# EAGLE board homegreen_node_basic v1.4.4_panel (EAGLE 9.6.2), part 1 of 2
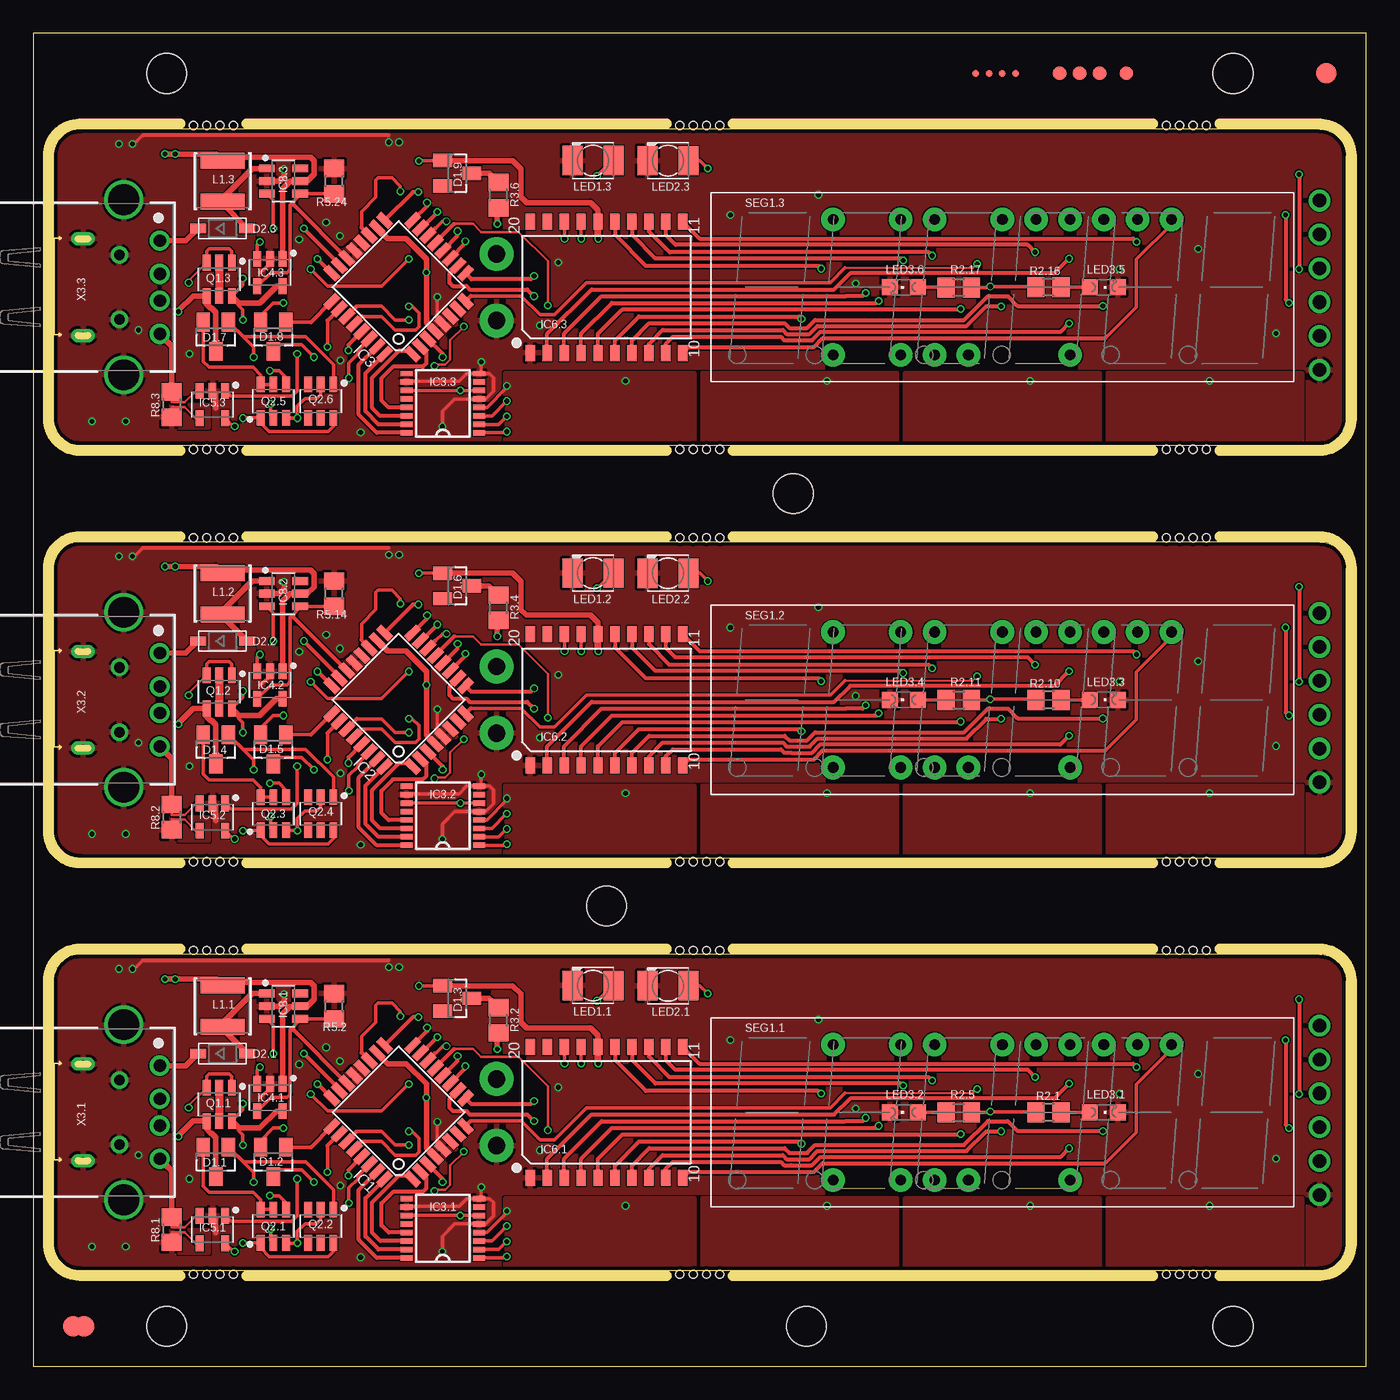
[diagram p0: board, top side]
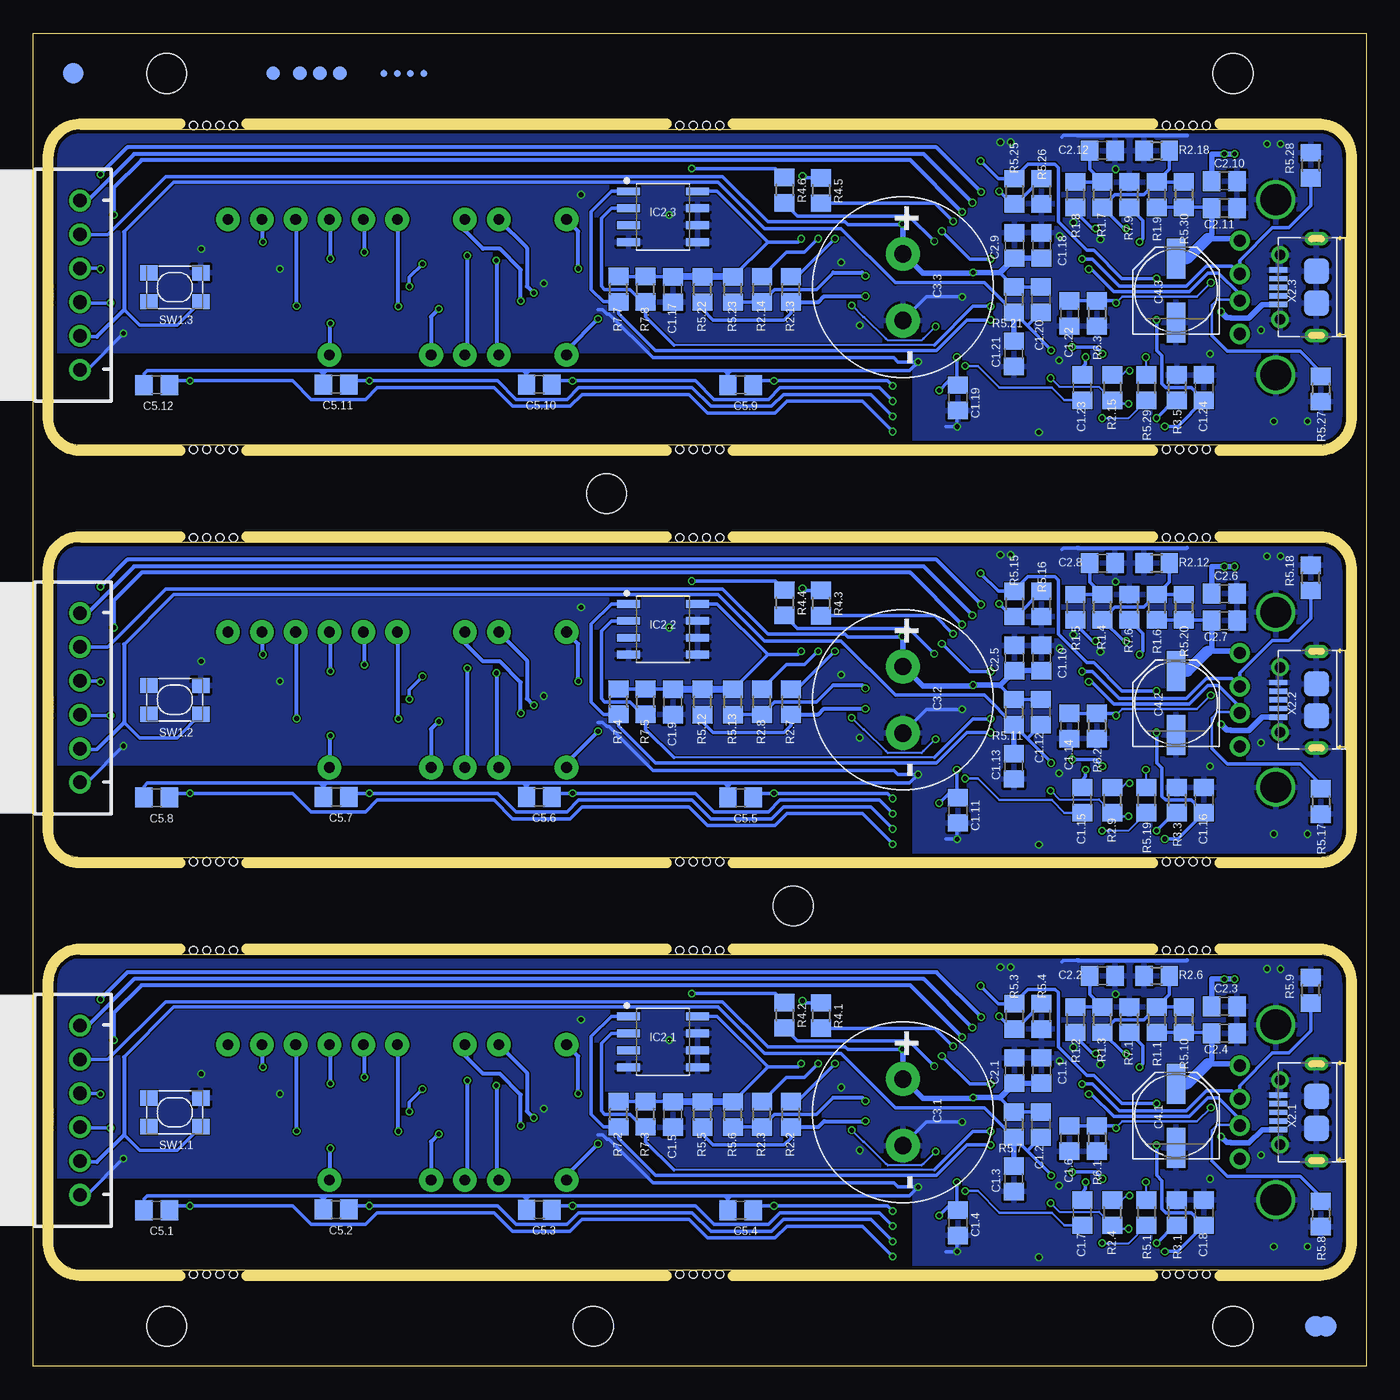
[diagram p1: board, bottom side, seen from below]

Size 100 x 100 mm. Coordinates in mm from the lower left corner, seen from the top.
Outline: 0,0 100,0 100,100 0,100 0,0
Outline: 3.5,7.2 96.5,7.2 arc90 98.5,9.2 98.5,28.9 arc90 96.5,30.9 3.5,30.9 arc90 1.5,28.9 1.5,9.2 arc90 3.5,7.2
Outline: 3.5,38.15 96.5,38.15 arc90 98.5,40.15 98.5,59.85 arc90 96.5,61.85 3.5,61.85 arc90 1.5,59.85 1.5,40.15 arc90 3.5,38.15
Outline: 3.5,69.1 96.5,69.1 arc90 98.5,71.1 98.5,90.8 arc90 96.5,92.8 3.5,92.8 arc90 1.5,90.8 1.5,71.1 arc90 3.5,69.1
Copper layers (1*16): Top 0.035mm / dielectric 1.5mm / Bottom 0.035mm
Design rules "seeed_advanced_2layer": minimum track width 4mil, minimum drill 0.2mm, track to track 4mil, track to pad 4mil, pad to pad 4mil, via to via 12mil, smd to smd 4mil, copper to edge 0.3mm, drill to drill 0.2mm, minimum pad ring 0.1mm, minimum via ring 0.1mm, stop-mask expansion 0.1mm, vias tented up to drill 0mil, thermal gap 0.2mm
Holes 0.6 mm at 13,62.15 14,62.15 49.5,62.15 50.5,62.15 86,62.15 87,62.15 86,37.85 87,37.85 49.5,37.85 50.5,37.85 13,37.85 14,37.85 13,93.1 14,93.1 49.5,93.1 50.5,93.1 86,93.1 87,93.1 86,68.8 87,68.8 49.5,68.8 50.5,68.8 13,68.8 14,68.8 13,31.2 14,31.2 49.5,31.2 50.5,31.2 86,31.2 87,31.2 86,6.9 87,6.9 49.5,6.9 50.5,6.9 13,6.9 14,6.9 12,93.1 15,93.1 48.5,93.1 51.5,93.1 85,93.1 88,93.1 12,68.8 15,68.8 48.5,68.8 51.5,68.8 85,68.8 88,68.8 12,62.15 15,62.15 48.5,62.15 51.5,62.15 85,62.15 88,62.15 85,37.85 88,37.85 48.5,37.85 51.5,37.85 12,37.85 15,37.85 12,31.2 15,31.2 48.5,31.2 51.5,31.2 85,31.2 88,31.2 85,6.9 88,6.9 48.5,6.9 51.5,6.9 12,6.9 15,6.9
Holes 3 mm at 57,65.47 43,34.52 58,3 10,3 90,3 10,97 90,97
Milling: 42 lines

## Footprints (pad centres in the part's own frame; a part is rotated, then mirrored left to right if it is on the bottom)
C0805 = smd 1.3 x 1.5: 1 -0.95,0; 2 0.95,0
C_FYD0H104ZF = drill 1.3 pad 2.54: + -2.5,0; - 2.5,0
PANASONIC_D = smd 3 x 1.4: + 2.4,0; - -2.4,0
SOT23 = smd 1 x 1.4: 1 -0.95,-1.1; 2 0.95,-1.1; 3 0,1.1
SOD-123 = smd 1.2 x 0.7: A 1.85,0; C -1.85,0
FID_060_P = smd 1.524 x 1.524 bottom: FIDB 0,0 | smd 1.524 x 1.524: FIDT 0,0
FID_040_P = smd 1.016 x 1.016 bottom: FIDB 0,0 | smd 1.016 x 1.016: FIDT 0,0
FID_020_P = smd 0.508 x 0.508 bottom: FIDB 0,0 | smd 0.508 x 0.508: FIDT 0,0
TQFP32-08 = smd 1.27 x 0.559: 1 -4.293,2.8; 2 -4.293,2; 3 -4.293,1.2; 4 -4.293,0.4; 5 -4.293,-0.4; 6 -4.293,-1.2; 7 -4.293,-2; 8 -4.293,-2.8; 17 4.293,-2.8; 18 4.293,-2; 19 4.293,-1.2; 20 4.293,-0.4; 21 4.293,0.4; 22 4.293,1.2; 23 4.293,2; 24 4.293,2.8 | smd 0.559 x 1.27: 9 -2.8,-4.293; 10 -2,-4.293; 11 -1.2,-4.293; 12 -0.4,-4.293; 13 0.4,-4.293; 14 1.2,-4.293; 15 2,-4.293; 16 2.8,-4.293; 25 2.8,4.293; 26 2,4.293; 27 1.2,4.293; 28 0.4,4.293; 29 -0.4,4.293; 30 -1.2,4.293; 31 -2,4.293; 32 -2.8,4.293
SO8 = smd 1.746 x 0.592: 1 -2.585,1.905; 2 -2.585,0.635; 3 -2.585,-0.635; 4 -2.585,-1.905; 5 2.585,-1.905; 6 2.585,-0.635; 7 2.585,0.635; 8 2.585,1.905
SSOP16 = smd 0.914 x 0.406: 1 -2.718,2.223; 2 -2.718,1.587; 3 -2.718,0.953; 4 -2.718,0.318; 5 -2.718,-0.318; 6 -2.718,-0.953; 7 -2.718,-1.587; 8 -2.718,-2.223; 9 2.718,-2.223; 10 2.718,-1.587; 11 2.718,-0.953; 12 2.718,-0.318; 13 2.718,0.318; 14 2.718,0.953; 15 2.718,1.587; 16 2.718,2.223
SOT23-5 = smd 1.18 x 0.589: 1 -1.024,0.95; 2 -1.024,0; 3 -1.024,-0.95; 4 1.024,-0.95; 5 1.024,0.95
SOP20-1.27-12.7X7.65MM = smd 0.7 x 1.2: 1 -5.715,-4.925; 2 -4.445,-4.925; 3 -3.175,-4.925; 4 -1.905,-4.925; 5 -0.635,-4.925; 6 0.635,-4.925; 7 1.905,-4.925; 8 3.175,-4.925; 9 4.445,-4.925; 10 5.715,-4.925; 11 5.715,4.925; 12 4.445,4.925; 13 3.175,4.925; 14 1.905,4.925; 15 0.635,4.925; 16 -0.635,4.925; 17 -1.905,4.925; 18 -3.175,4.925; 19 -4.445,4.925; 20 -5.715,4.925
SOT23-6 = smd 1.171 x 0.589: 1 -1.25,0.95; 2 -1.25,0; 3 -1.25,-0.95; 4 1.25,-0.95; 5 1.25,0; 6 1.25,0.95
WE-LQSH_4020 = smd 1.2 x 3.3: 1 -1.55,0; 2 1.55,0
KA-3528ASYC = smd 1.5 x 2.2: A -1.55,0; C 1.55,0
CHIPLED_0805 = smd 1.2 x 1.2: A 0,-1.05; C 0,1.05
R0805 = smd 1.3 x 1.5: 1 -0.95,0; 2 0.95,0
7SEG_6D_FJ3661BH = drill 0.8 pad 1.778: P1 -12.7,-5.08; P3 -7.62,-5.08; P4 -5.08,-5.08; P5 -2.54,-5.08; P8 5.08,-5.08; P12 12.7,5.08; P13 10.16,5.08; P14 7.62,5.08; P15 5.08,5.08; P16 2.54,5.08; P17 0,5.08; P19 -5.08,5.08; P20 -7.62,5.08; P22 -12.7,5.08
SW4-SMD-4.2X3.2X2.5MM = smd 1.3 x 1.15: 1 -1.95,1.075; 2 1.95,1.075; 3 -1.95,-1.075; 4 1.95,-1.075
JST-XH-06-PACKAGE-ROUND-PAD-ANGLED = drill 1.016: 1 -6.35,0; 2 -3.81,0; 3 -1.27,0; 4 1.27,0; 5 3.81,0; 6 6.35,0
ZX62-B-5PA = smd 0.4 x 1.35: 1 -1.3,2.875; 2 -0.65,2.875; 3 0,2.875; 4 0.65,2.875; 5 1.3,2.875 | smd 1.9 x 1.9: P1 -1.2,0; P2 1.2,0 | drill 0.508 pad 1.016 long: P3 -3.625,0; P4 3.625,0 | drill 0.8: P5 -2.425,2.73; P6 2.425,2.73
61400416021 = drill 0.92: 1 -3.5,5.99; 2 -1,5.99; 3 1,5.99; 4 3.5,5.99 | drill 2.3: S1 -6.57,3.28; S2 6.57,3.28

## Placement (x,y rotation side)
C1.1  100n  [C0805]  24.36,22.19 270 bottom
C1.2  100n  [C0805]  24.41,18.12 90 bottom
C1.3  100n  [C0805]  26.44,14.06 90 bottom
C1.4  100n  [C0805]  30.63,10.76 270 bottom
C1.5  100n  [C0805]  52.01,18.88 90 bottom
C1.6  100n  [C0805]  22.25,17.08 90 bottom
C1.7  100n  [C0805]  21.31,11.52 90 bottom
C1.8  100n  [C0805]  12.17,11.52 90 bottom
C1.9  100n  [C0805]  52.01,49.83 90 bottom
C1.10  100n  [C0805]  24.36,53.14 270 bottom
C1.11  100n  [C0805]  30.63,41.71 270 bottom
C1.12  100n  [C0805]  24.41,49.07 90 bottom
C1.13  100n  [C0805]  26.44,45.01 90 bottom
C1.14  100n  [C0805]  22.25,48.03 90 bottom
C1.15  100n  [C0805]  21.31,42.47 90 bottom
C1.16  100n  [C0805]  12.17,42.47 90 bottom
C1.17  100n  [C0805]  52.01,80.78 90 bottom
C1.18  100n  [C0805]  24.36,84.09 270 bottom
C1.19  100n  [C0805]  30.63,72.66 270 bottom
C1.20  100n  [C0805]  24.41,80.02 90 bottom
C1.21  100n  [C0805]  26.44,75.96 90 bottom
C1.22  100n  [C0805]  22.25,78.98 90 bottom
C1.23  100n  [C0805]  21.31,73.42 90 bottom
C1.24  100n  [C0805]  12.17,73.42 90 bottom
C2.1  10u  [C0805]  26.39,22.19 270 bottom
C2.2  10u  [C0805]  19.79,29.3 0 bottom
C2.3  10u  [C0805]  10.64,27.01 0 bottom
C2.4  10u  [C0805]  10.64,24.98 0 bottom
C2.5  10u  [C0805]  26.39,53.14 270 bottom
C2.6  10u  [C0805]  10.64,57.96 0 bottom
C2.7  10u  [C0805]  10.64,55.93 0 bottom
C2.8  10u  [C0805]  19.79,60.25 0 bottom
C2.9  10u  [C0805]  26.39,84.09 270 bottom
C2.10  10u  [C0805]  10.64,88.91 0 bottom
C2.11  10u  [C0805]  10.64,86.88 0 bottom
C2.12  10u  [C0805]  19.79,91.2 0 bottom
C3.1  0.33F  [C_FYD0H104ZF]  34.75,19.05 270 bottom
C3.2  0.33F  [C_FYD0H104ZF]  34.75,50 270 bottom
C3.3  0.33F  [C_FYD0H104ZF]  34.75,80.95 270 bottom
C4.1  330u  [PANASONIC_D]  14.26,18.8 90 bottom
C4.2  330u  [PANASONIC_D]  14.26,49.75 90 bottom
C4.3  330u  [PANASONIC_D]  14.26,80.7 90 bottom
C5.1  5p  [C0805]  90.74,11.71 180 bottom
C5.2  5p  [C0805]  77.28,11.76 180 bottom
C5.3  5p  [C0805]  62.04,11.75 180 bottom
C5.4  5p  [C0805]  46.93,11.71 180 bottom
C5.5  5p  [C0805]  46.93,42.66 180 bottom
C5.6  5p  [C0805]  62.04,42.7 180 bottom
C5.7  5p  [C0805]  77.28,42.71 180 bottom
C5.8  5p  [C0805]  90.74,42.66 180 bottom
C5.9  5p  [C0805]  46.93,73.61 180 bottom
C5.10  5p  [C0805]  62.04,73.65 180 bottom
C5.11  5p  [C0805]  77.28,73.66 180 bottom
C5.12  5p  [C0805]  90.74,73.61 180 bottom
D1.1  BAT54S  [SOT23]  13.69,15.33 180 top
D1.2  BAT54S  [SOT23]  18.01,15.33 180 top
D1.3  BAT54S  [SOT23]  31.8,27.6 270 top
D1.4  BAT54S  [SOT23]  13.69,46.28 180 top
D1.5  BAT54S  [SOT23]  18.01,46.28 180 top
D1.6  BAT54S  [SOT23]  31.8,58.55 270 top
D1.7  BAT54S  [SOT23]  13.69,77.23 180 top
D1.8  BAT54S  [SOT23]  18.01,77.23 180 top
D1.9  BAT54S  [SOT23]  31.8,89.5 270 top
D2.1  DSS24  [SOD-123]  14.2,23.46 0 top
D2.2  DSS24  [SOD-123]  14.2,54.41 0 top
D2.3  DSS24  [SOD-123]  14.2,85.36 0 top
E$1  [FID_060_P]  3,3 0 top
E$2  [FID_060_P]  3.8,3 0 top
E$3  [FID_060_P]  97,97 0 top
E$4  [FID_040_P]  82,97 0 top
E$5  [FID_040_P]  80,97 0 top
E$6  [FID_040_P]  78.5,97 0 top
E$7  [FID_040_P]  77,97 0 top
E$8  [FID_020_P]  73.7,97 0 top
E$9  [FID_020_P]  72.7,97 0 top
E$10  [FID_020_P]  71.7,97 0 top
E$11  [FID_020_P]  70.7,97 0 top
IC1  [TQFP32-08]  27.41,19.05 135 top
IC2  [TQFP32-08]  27.41,50 135 top
IC2.1  LM75B  [SO8]  52.76,24.34 0 bottom
IC2.2  LM75B  [SO8]  52.76,55.29 0 bottom
IC2.3  LM75B  [SO8]  52.76,86.24 0 bottom
IC3  [TQFP32-08]  27.41,80.95 135 top
IC3.1  TTP224NS  [SSOP16]  30.73,10.35 180 top
IC3.2  TTP224NS  [SSOP16]  30.73,41.3 180 top
IC3.3  TTP224NS  [SSOP16]  30.73,72.25 180 top
IC4.1  MT9700MT9700  [SOT23-5]  17.76,20.15 270 top
IC4.2  MT9700MT9700  [SOT23-5]  17.76,51.1 270 top
IC4.3  MT9700MT9700  [SOT23-5]  17.76,82.05 270 top
IC5.1  INA180  [SOT23-5]  13.44,10.25 270 top
IC5.2  INA180  [SOT23-5]  13.44,41.2 270 top
IC5.3  INA180  [SOT23-5]  13.44,72.15 270 top
IC6.1  TM1637-sop20  [SOP20-1.27-12.7X7.65MM]  43,19.05 0 top
IC6.2  TM1637-sop20  [SOP20-1.27-12.7X7.65MM]  43,50 0 top
IC6.3  TM1637-sop20  [SOP20-1.27-12.7X7.65MM]  43,80.95 0 top
IC8.1  MT3608  [SOT23-6]  18.77,27.01 0 top
IC8.2  MT3608  [SOT23-6]  18.77,57.96 0 top
IC8.3  MT3608  [SOT23-6]  18.77,88.91 0 top
L1.1  TYA40202R2M-10  [WE-LQSH_4020]  14.2,27.01 270 top
L1.2  TYA40202R2M-10  [WE-LQSH_4020]  14.2,57.96 270 top
L1.3  TYA40202R2M-10  [WE-LQSH_4020]  14.2,88.91 270 top
LED1.1  green  [KA-3528ASYC]  41.99,28.55 180 top
LED1.2  green  [KA-3528ASYC]  41.99,59.5 180 top
LED1.3  green  [KA-3528ASYC]  41.99,90.45 180 top
LED2.1  red  [KA-3528ASYC]  47.62,28.54 180 top
LED2.2  red  [KA-3528ASYC]  47.62,59.49 180 top
LED2.3  red  [KA-3528ASYC]  47.62,90.44 180 top
LED3.1  white  [CHIPLED_0805]  80.3,19.05 270 top
LED3.2  white  [CHIPLED_0805]  65.3,19.05 90 top
LED3.3  white  [CHIPLED_0805]  80.3,50 270 top
LED3.4  white  [CHIPLED_0805]  65.3,50 90 top
LED3.5  white  [CHIPLED_0805]  80.3,80.95 270 top
LED3.6  white  [CHIPLED_0805]  65.3,80.95 90 top
Q1.1  WST2011  [SOT23-6]  13.95,19.65 270 top
Q1.2  WST2011  [SOT23-6]  13.95,50.6 270 top
Q1.3  WST2011  [SOT23-6]  13.95,81.55 270 top
Q2.1  BC817DPN  [SOT23-6]  18.01,10.5 90 top
Q2.2  BC817DPN  [SOT23-6]  21.57,10.5 270 top
Q2.3  BC817DPN  [SOT23-6]  18.01,41.45 90 top
Q2.4  BC817DPN  [SOT23-6]  21.57,41.45 270 top
Q2.5  BC817DPN  [SOT23-6]  18.01,72.4 90 top
Q2.6  BC817DPN  [SOT23-6]  21.57,72.4 270 top
R1.1  10k  [R0805]  15.72,26 270 bottom
R1.2  10k  [R0805]  21.82,26 270 bottom
R1.3  10k  [R0805]  19.79,26 90 bottom
R1.4  10k  [R0805]  19.79,56.95 90 bottom
R1.5  10k  [R0805]  21.82,56.95 270 bottom
R1.6  10k  [R0805]  15.72,56.95 270 bottom
R1.7  10k  [R0805]  19.79,87.9 90 bottom
R1.8  10k  [R0805]  21.82,87.9 270 bottom
R1.9  10k  [R0805]  15.72,87.9 270 bottom
R2.1  1k  [R0805]  76.17,19.04 180 top
R2.2  1k  [R0805]  43.16,18.9 90 bottom
R2.3  1k  [R0805]  45.34,18.9 90 bottom
R2.4  1k  [R0805]  19.03,11.52 90 bottom
R2.5  1k  [R0805]  69.43,19.04 0 top
R2.6  1k  [R0805]  15.72,29.3 0 bottom
R2.7  1k  [R0805]  43.16,49.85 90 bottom
R2.8  1k  [R0805]  45.34,49.85 90 bottom
R2.9  1k  [R0805]  19.03,42.47 90 bottom
R2.10  1k  [R0805]  76.17,49.99 180 top
R2.11  1k  [R0805]  69.43,49.99 0 top
R2.12  1k  [R0805]  15.72,60.25 0 bottom
R2.13  1k  [R0805]  43.16,80.8 90 bottom
R2.14  1k  [R0805]  45.34,80.8 90 bottom
R2.15  1k  [R0805]  19.03,73.42 90 bottom
R2.16  1k  [R0805]  76.17,80.94 180 top
R2.17  1k  [R0805]  69.43,80.94 0 top
R2.18  1k  [R0805]  15.72,91.2 0 bottom
R3.1  47  [R0805]  14.2,11.52 270 bottom
R3.2  47  [R0805]  34.9,25.96 90 top
R3.3  47  [R0805]  14.2,42.47 270 bottom
R3.4  47  [R0805]  34.9,56.91 90 top
R3.5  47  [R0805]  14.2,73.42 270 bottom
R3.6  47  [R0805]  34.9,87.86 90 top
R4.1  3k  [R0805]  40.9,26.3 270 bottom
R4.2  3k  [R0805]  43.64,26.34 270 bottom
R4.3  3k  [R0805]  40.9,57.25 270 bottom
R4.4  3k  [R0805]  43.64,57.29 270 bottom
R4.5  3k  [R0805]  40.9,88.2 270 bottom
R4.6  3k  [R0805]  43.64,88.24 270 bottom
R5.1  100k  [R0805]  16.49,11.52 270 bottom
R5.2  100k  [R0805]  22.58,27.01 90 top
R5.3  100k  [R0805]  26.39,26.25 270 bottom
R5.4  100k  [R0805]  24.36,26.25 270 bottom
R5.5  100k  [R0805]  49.79,18.88 90 bottom
R5.6  100k  [R0805]  47.51,18.88 90 bottom
R5.7  100k  [R0805]  26.44,18.12 270 bottom
R5.8  100k  [R0805]  3.4,11.42 270 bottom
R5.9  100k  [R0805]  4.15,28.2 90 bottom
R5.10  100k  [R0805]  13.69,26 270 bottom
R5.11  100k  [R0805]  26.44,49.07 270 bottom
R5.12  100k  [R0805]  49.79,49.83 90 bottom
R5.13  100k  [R0805]  47.51,49.83 90 bottom
R5.14  100k  [R0805]  22.58,57.96 90 top
R5.15  100k  [R0805]  26.39,57.2 270 bottom
R5.16  100k  [R0805]  24.36,57.2 270 bottom
R5.17  100k  [R0805]  3.4,42.37 270 bottom
R5.18  100k  [R0805]  4.15,59.15 90 bottom
R5.19  100k  [R0805]  16.49,42.47 270 bottom
R5.20  100k  [R0805]  13.69,56.95 270 bottom
R5.21  100k  [R0805]  26.44,80.02 270 bottom
R5.22  100k  [R0805]  49.79,80.78 90 bottom
R5.23  100k  [R0805]  47.51,80.78 90 bottom
R5.24  100k  [R0805]  22.58,88.91 90 top
R5.25  100k  [R0805]  26.39,88.15 270 bottom
R5.26  100k  [R0805]  24.36,88.15 270 bottom
R5.27  100k  [R0805]  3.4,73.32 270 bottom
R5.28  100k  [R0805]  4.15,90.1 90 bottom
R5.29  100k  [R0805]  16.49,73.42 270 bottom
R5.30  100k  [R0805]  13.69,87.9 270 bottom
R6.1  1M  [R0805]  20.21,17.08 270 bottom
R6.2  1M  [R0805]  20.21,48.03 270 bottom
R6.3  1M  [R0805]  20.21,78.98 270 bottom
R7.1  4k7  [R0805]  17.76,26 90 bottom
R7.2  4k7  [R0805]  56.09,18.91 90 bottom
R7.3  4k7  [R0805]  54.06,18.91 90 bottom
R7.4  4k7  [R0805]  56.09,49.86 90 bottom
R7.5  4k7  [R0805]  54.06,49.86 90 bottom
R7.6  4k7  [R0805]  17.76,56.95 90 bottom
R7.7  4k7  [R0805]  56.09,80.81 90 bottom
R7.8  4k7  [R0805]  54.06,80.81 90 bottom
R7.9  4k7  [R0805]  17.76,87.9 90 bottom
R8.1  20m  [R0805]  10.39,10.25 270 top
R8.2  20m  [R0805]  10.39,41.2 270 top
R8.3  20m  [R0805]  10.39,72.15 270 top
SEG1.1  7-SEGMENT-6DIGIT-FJ3661BH  [7SEG_6D_FJ3661BH]  72.7,19.05 0 top
SEG1.2  7-SEGMENT-6DIGIT-FJ3661BH  [7SEG_6D_FJ3661BH]  72.7,50 0 top
SEG1.3  7-SEGMENT-6DIGIT-FJ3661BH  [7SEG_6D_FJ3661BH]  72.7,80.95 0 top
SW1.1  DHT-4235A  [SW4-SMD-4.2X3.2X2.5MM]  89.38,19.05 180 bottom
SW1.2  DHT-4235A  [SW4-SMD-4.2X3.2X2.5MM]  89.38,50 180 bottom
SW1.3  DHT-4235A  [SW4-SMD-4.2X3.2X2.5MM]  89.38,80.95 180 bottom
X1.1  JST-XH-06-PIN-ANGLED  [JST-XH-06-PACKAGE-ROUND-PAD-ANGLED]  96.5,19.2 90 bottom
X1.2  JST-XH-06-PIN-ANGLED  [JST-XH-06-PACKAGE-ROUND-PAD-ANGLED]  96.5,50.15 90 bottom
X1.3  JST-XH-06-PIN-ANGLED  [JST-XH-06-PACKAGE-ROUND-PAD-ANGLED]  96.5,81.1 90 bottom
X2.1  ZX62-B-5PA  [ZX62-B-5PA]  3.73,19.05 90 bottom
X2.2  ZX62-B-5PA  [ZX62-B-5PA]  3.73,50 90 bottom
X2.3  ZX62-B-5PA  [ZX62-B-5PA]  3.73,80.95 90 bottom
X3.1  61400416021  [61400416021]  3.5,19.05 270 top
X3.2  61400416021  [61400416021]  3.5,50 270 top
X3.3  61400416021  [61400416021]  3.5,80.95 270 top

## Library data of the parts
C1.1-C1.7 C1.9-C1.15 C1.17-C1.23 C2.1 C2.5 C2.9 C4.1-C4.3 C5.1-C5.12 = rcl; SPICEPREFIX: C
C1.8 C1.16 C1.24 C2.2-C2.4 C2.6-C2.8 C2.10-C2.12 R1.1-R1.9 R2.6 R2.12 R2.18 R5.10 R5.20 R5.30 = resistor
C3.1-C3.3 D2.1-D2.3 E$1-E$11 IC1 IC2 IC2.1-IC2.3 IC3 IC3.1-IC3.3 IC4.1-IC4.3 IC5.1-IC5.3 IC8.1-IC8.3 LED1.1-LED1.3 LED2.1-LED2.3 LED3.1-LED3.6 Q1.1-Q1.3 Q2.1-Q2.6 SEG1.1-SEG1.3 X1.1-X1.3 = philmalessa
D1.1-D1.9 = diode
IC6.1-IC6.3 = philmalessa; MPN: TM1637
L1.1-L1.3 = Wurth_Power Magnetics_WE-LQSH; DATASHEET-URL: https://katalog.we-online.com/pbs/datasheet/744050420047.pdf; FRES: 89MHz; IR: 4.5A; ISAT: 15.5A; PART-NUMBER: 744050420047; RDC-MAX: 22mOhm; RDC-TYP: 18mOhm
R2.1-R2.5 R2.7-R2.11 R2.13-R2.17 R3.1-R3.6 R4.1-R4.6 R5.1-R5.9 R5.11-R5.19 R5.21-R5.29 R6.1-R6.3 R7.1-R7.9 R8.1-R8.3 = rcl; SPICEPREFIX: R
SW1.1-SW1.3 = philmalessa; MPN: DHT-4235A
X2.1-X2.3 = philmalessa; MPN: ZX62-B-5PA
X3.1-X3.3 = Wurth_Connectors_WR-USB; APPLICATION: USB 2.0; DATASHEET-URL: https://www.we-online.com/catalog/datasheet/61400416021.pdf; GERDER: Receptacle; INTERFACE-TYPE: Type A; IR1: 1.5A; MOUNT: THT; PACKAGING: Tray; PART-NUMBER: 61400416021; PINS: 4; TYPE: Horizontal; WORKING-VOLTAGE: 30V(AC)

## Nets
!EN_PB: D1.2.1 IC1.25
!EN_PB1: D1.5.1 IC2.25
!EN_PB2: D1.8.1 IC3.25
+5V: C1.5.2 C1.8.1 D1.3.1 IC2.1.8 IC4.1.5 IC5.1.5 IC6.1.16 Q1.1.6 R5.3.1 R5.5.2 R5.6.2 R7.2.2 R7.3.2
+5V1: C1.9.2 C1.16.1 D1.6.1 IC2.2.8 IC4.2.5 IC5.2.5 IC6.2.16 Q1.2.6 R5.12.2 R5.13.2 R5.15.1 R7.4.2 R7.5.2
+5V2: C1.17.2 C1.24.1 D1.9.1 IC2.3.8 IC4.3.5 IC5.3.5 IC6.3.16 Q1.3.6 R5.22.2 R5.23.2 R5.25.1 R7.7.2 R7.8.2
BAT_PWR: C1.1.2 C1.2.2 C2.1.2 C3.1.+ IC1.4 IC1.18 R3.2.1 R5.7.1 X1.1.5
BAT_PWR1: C1.10.2 C1.12.2 C2.5.2 C3.2.+ IC2.4 IC2.18 R3.4.1 R5.11.1 X1.2.5
BAT_PWR2: C1.18.2 C1.20.2 C2.9.2 C3.3.+ IC3.4 IC3.18 R3.6.1 R5.21.1 X1.3.5
BTN_LED: IC1.8 R2.1.2 R2.5.2
BTN_LED1: IC2.8 R2.10.2 R2.11.2
BTN_LED2: IC3.8 R2.16.2 R2.17.2
BUT_MAN: IC1.2 IC3.1.13
BUT_MAN1: IC2.2 IC3.2.13
BUT_MAN2: IC3.2 IC3.3.13
BUT_MIN: IC1.1 IC3.1.14
BUT_MIN1: IC2.1 IC3.2.14
BUT_MIN2: IC3.1 IC3.3.14
BUT_PLUS: IC1.31 IC3.1.16
BUT_PLUS1: IC2.31 IC3.2.16
BUT_PLUS2: IC3.3.16 IC3.31
BUT_SET: IC1.32 IC3.1.15
BUT_SET1: IC2.32 IC3.2.15
BUT_SET2: IC3.3.15 IC3.32
DIG1: IC6.1.15 SEG1.1.P22
DIG2: IC6.1.14 SEG1.1.P3
DIG3: IC6.1.13 SEG1.1.P4
DIG4: IC6.1.12 SEG1.1.P16
DIG5: IC6.1.11 SEG1.1.P13
DIG6: IC6.1.10 SEG1.1.P12
DIG7: IC6.2.10 SEG1.2.P12
DIG8: IC6.2.11 SEG1.2.P13
DIG9: IC6.2.12 SEG1.2.P16
DIG10: IC6.2.13 SEG1.2.P4
DIG11: IC6.2.14 SEG1.2.P3
DIG12: IC6.2.15 SEG1.2.P22
DIG13: IC6.3.10 SEG1.3.P12
DIG14: IC6.3.11 SEG1.3.P13
DIG15: IC6.3.12 SEG1.3.P16
DIG16: IC6.3.13 SEG1.3.P4
DIG17: IC6.3.14 SEG1.3.P3
DIG18: IC6.3.15 SEG1.3.P22
EN_CLK: C1.7.1 IC1.13
EN_CLK1: C1.15.1 IC2.13
EN_CLK2: C1.23.1 IC3.13
EN_LOAD: IC1.30 Q2.1.2 R2.4.1
EN_LOAD1: IC2.30 Q2.3.2 R2.9.1
EN_LOAD2: IC3.30 Q2.5.2 R2.15.1
GND: C1.1.1 C1.3.1 C1.4.2 C1.5.1 C1.6.1 C1.8.2 C2.1.1 C2.2.2 C2.3.2 C2.4.2 C3.1.- C4.1.- C5.1.2 C5.2.2 C5.3.2 C5.4.2 IC1.5 IC1.21 IC2.1.4 IC2.1.5 IC2.1.6 IC2.1.7 IC3.1.5 IC3.1.8 IC3.1.10 IC4.1.2 IC5.1.2 IC5.1.4 IC6.1.1 IC8.1.2 LED1.1.C LED2.1.C LED3.1.C LED3.2.C R2.6.1 R3.1.1 R5.2.2 R5.4.2 R5.8.2 R5.9.2 R6.1.2 R7.1.2 R8.1.2 SW1.1.3 X1.1.1 X2.1.5 X2.1.P1 X2.1.P2 X2.1.P3 X2.1.P4 X2.1.P5 X2.1.P6 X3.1.S1 X3.1.S2
GND1: C1.9.1 C1.10.1 C1.11.2 C1.13.1 C1.14.1 C1.16.2 C2.5.1 C2.6.2 C2.7.2 C2.8.2 C3.2.- C4.2.- C5.5.2 C5.6.2 C5.7.2 C5.8.2 IC2.2.4 IC2.2.5 IC2.2.6 IC2.2.7 IC2.5 IC2.21 IC3.2.5 IC3.2.8 IC3.2.10 IC4.2.2 IC5.2.2 IC5.2.4 IC6.2.1 IC8.2.2 LED1.2.C LED2.2.C LED3.3.C LED3.4.C R2.12.1 R3.3.1 R5.14.2 R5.16.2 R5.17.2 R5.18.2 R6.2.2 R7.6.2 R8.2.2 SW1.2.3 X1.2.1 X2.2.5 X2.2.P1 X2.2.P2 X2.2.P3 X2.2.P4 X2.2.P5 X2.2.P6 X3.2.S1 X3.2.S2
GND4: C1.17.1 C1.18.1 C1.19.2 C1.21.1 C1.22.1 C1.24.2 C2.9.1 C2.10.2 C2.11.2 C2.12.2 C3.3.- C4.3.- C5.9.2 C5.10.2 C5.11.2 C5.12.2 IC2.3.4 IC2.3.5 IC2.3.6 IC2.3.7 IC3.3.5 IC3.3.8 IC3.3.10 IC3.5 IC3.21 IC4.3.2 IC5.3.2 IC5.3.4 IC6.3.1 IC8.3.2 LED1.3.C LED2.3.C LED3.5.C LED3.6.C R2.18.1 R3.5.1 R5.24.2 R5.26.2 R5.27.2 R5.28.2 R6.3.2 R7.9.2 R8.3.2 SW1.3.3 X1.3.1 X2.3.5 X2.3.P1 X2.3.P2 X2.3.P3 X2.3.P4 X2.3.P5 X2.3.P6 X3.3.S1 X3.3.S2
LED1: IC1.14 R4.1.2
LED2: IC1.11 R4.2.2
LED3: IC2.11 R4.4.2
LED4: IC2.14 R4.3.2
LED5: IC3.11 R4.6.2
LED6: IC3.14 R4.5.2
MISO: IC1.16 X1.1.6
MISO1: IC2.16 X1.2.6
MISO2: IC3.16 X1.3.6
MOSI: IC1.15 X1.1.3
MOSI1: IC2.15 X1.2.3
MOSI2: IC3.15 X1.3.3
N$1: IC6.1.18 R2.2.2
N$2: C2.3.1 IC4.1.1 IC8.1.5 L1.1.1
N$3: Q1.1.2 Q1.1.5
N$4: IC6.1.17 R2.3.2
N$5: D1.3.3 R3.2.2
N$6: Q2.1.1 Q2.2.6 R3.1.2
N$7: LED1.1.A R4.1.1
N$8: IC1.19 R5.3.2 R5.4.1
N$9: C1.7.2 D1.2.3
N$10: Q2.1.4 R2.4.2
N$11: LED2.1.A R4.2.1
N$12: D1.1.2 Q2.1.5 Q2.1.6
N$13: C2.2.1 R1.2.1 R1.3.2
N$14: D1.1.1 Q2.2.1 R5.1.1
N$15: Q2.1.3 Q2.2.2 R5.1.2
N$16: LED3.1.A R2.1.1
N$17: C1.6.2 D1.2.2 Q1.1.1 Q1.1.3 R6.1.1
N$18: LED3.2.A R2.5.1
N$19: C2.4.1 C4.1.+ D2.1.C R1.1.2 R5.10.2 X3.1.1
N$20: D1.6.3 R3.4.2
N$21: LED1.2.A R4.3.1
N$22: IC5.1.3 R8.1.1 X3.1.4
N$23: IC4.1.3 R7.1.1
N$24: IC6.2.18 R2.7.2
N$25: IC6.2.17 R2.8.2
N$26: IC2.19 R5.15.2 R5.16.1
N$27: C1.14.2 D1.5.2 Q1.2.1 Q1.2.3 R6.2.1
N$28: Q2.3.1 Q2.4.6 R3.3.2
N$29: D1.4.2 Q2.3.5 Q2.3.6
N$30: D2.1.A IC8.1.1 L1.1.2
N$31: IC8.1.3 R1.1.1 R1.3.1 R2.6.2 R5.10.1
N$32: D1.4.1 Q2.4.1 R5.19.1
N$33: Q2.3.3 Q2.4.2 R5.19.2
N$34: Q2.3.4 R2.9.2
N$35: Q1.2.2 Q1.2.5
N$36: C1.15.2 D1.5.3
N$37: LED2.2.A R4.4.1
N$38: LED3.3.A R2.10.1
N$39: LED3.4.A R2.11.1
N$40: D2.2.A IC8.2.1 L1.2.2
N$41: IC8.2.3 R1.4.1 R1.6.1 R2.12.2 R5.20.1
N$42: C2.7.1 C4.2.+ D2.2.C R1.6.2 R5.20.2 X3.2.1
N$43: C2.8.1 R1.4.2 R1.5.1
N$44: C2.6.1 IC4.2.1 IC8.2.5 L1.2.1
N$45: IC4.2.3 R7.6.1
N$46: IC5.2.3 R8.2.1 X3.2.4
N$47: D1.9.3 R3.6.2
N$48: LED1.3.A R4.5.1
N$49: IC6.3.18 R2.13.2
N$50: IC6.3.17 R2.14.2
N$51: IC3.19 R5.25.2 R5.26.1
N$52: C1.22.2 D1.8.2 Q1.3.1 Q1.3.3 R6.3.1
N$53: Q2.5.1 Q2.6.6 R3.5.2
N$54: D1.7.2 Q2.5.5 Q2.5.6
N$55: D1.7.1 Q2.6.1 R5.29.1
N$56: Q2.5.3 Q2.6.2 R5.29.2
N$57: Q2.5.4 R2.15.2
N$58: Q1.3.2 Q1.3.5
N$59: C1.23.2 D1.8.3
N$60: LED2.3.A R4.6.1
N$61: LED3.5.A R2.16.1
N$62: LED3.6.A R2.17.1
N$63: D2.3.A IC8.3.1 L1.3.2
N$64: IC8.3.3 R1.7.1 R1.9.1 R2.18.2 R5.30.1
N$65: C2.11.1 C4.3.+ D2.3.C R1.9.2 R5.30.2 X3.3.1
N$66: C2.12.1 R1.7.2 R1.8.1
N$67: C2.10.1 IC4.3.1 IC8.3.5 L1.3.1
N$68: IC4.3.3 R7.9.1
N$69: IC5.3.3 R8.3.1 X3.3.4
PAD_MAN: C5.4.1 IC3.1.4
PAD_MAN1: C5.5.1 IC3.2.4
PAD_MAN2: C5.9.1 IC3.3.4
PAD_MIN: C5.3.1 IC3.1.3
PAD_MIN1: C5.6.1 IC3.2.3
PAD_MIN2: C5.10.1 IC3.3.3
PAD_PLUS: C5.1.1 IC3.1.1
PAD_PLUS1: C5.8.1 IC3.2.1
PAD_PLUS2: C5.12.1 IC3.3.1
PAD_SET: C5.2.1 IC3.1.2
PAD_SET1: C5.7.1 IC3.2.2
PAD_SET2: C5.11.1 IC3.3.2
PUMP: IC1.22 IC4.1.4 IC8.1.4 R5.2.1
PUMP1: IC2.22 IC4.2.4 IC8.2.4 R5.14.1
PUMP2: IC3.22 IC4.3.4 IC8.3.4 R5.24.1
PUMP_CURRENT: IC1.26 IC5.1.1
PUMP_CURRENT1: IC2.26 IC5.2.1
PUMP_CURRENT2: IC3.26 IC5.3.1
PUMP_VOL: IC1.23 R1.2.2
PUMP_VOL1: IC2.23 R1.5.2
PUMP_VOL2: IC3.23 R1.8.2
RESET: C1.2.1 C1.3.2 IC1.29 R5.7.2 SW1.1.1 X1.1.2
RESET1: C1.12.1 C1.13.2 IC2.29 R5.11.2 SW1.2.1 X1.2.2
RESET2: C1.20.1 C1.21.2 IC3.29 R5.21.2 SW1.3.1 X1.3.2
SCK: IC1.17 X1.1.4
SCK1: IC2.17 X1.2.4
SCK2: IC3.17 X1.3.4
SCL: IC1.28 IC2.1.2 R7.3.1
SCL1: IC2.2.2 IC2.28 R7.5.1
SCL2: IC2.3.2 IC3.28 R7.8.1
SDA: IC1.27 IC2.1.1 R7.2.1
SDA1: IC2.2.1 IC2.27 R7.4.1
SDA2: IC2.3.1 IC3.27 R7.7.1
SEG1: IC6.1.2 SEG1.1.P15
SEG2: IC6.1.3 SEG1.1.P20
SEG3: IC6.1.4 SEG1.1.P19
SEG4: IC6.1.5 SEG1.1.P5
SEG5: IC6.1.6 SEG1.1.P1
SEG6: IC6.1.7 SEG1.1.P14
SEG7: IC6.1.8 SEG1.1.P17
SEG8: IC6.1.9 SEG1.1.P8
SEG9: IC6.2.2 SEG1.2.P15
SEG10: IC6.2.3 SEG1.2.P20
SEG11: IC6.2.4 SEG1.2.P19
SEG12: IC6.2.5 SEG1.2.P5
SEG13: IC6.2.6 SEG1.2.P1
SEG14: IC6.2.7 SEG1.2.P14
SEG15: IC6.2.8 SEG1.2.P17
SEG16: IC6.2.9 SEG1.2.P8
SEG17: IC6.3.2 SEG1.3.P15
SEG18: IC6.3.3 SEG1.3.P20
SEG19: IC6.3.4 SEG1.3.P19
SEG20: IC6.3.5 SEG1.3.P5
SEG21: IC6.3.6 SEG1.3.P1
SEG22: IC6.3.7 SEG1.3.P14
SEG23: IC6.3.8 SEG1.3.P17
SEG24: IC6.3.9 SEG1.3.P8
TM_CLK: IC1.10 R2.2.1 R5.5.1
TM_CLK1: IC2.10 R2.7.1 R5.12.1
TM_CLK2: IC3.10 R2.13.1 R5.22.1
TM_DIO: IC1.9 R2.3.1 R5.6.1
TM_DIO1: IC2.9 R2.8.1 R5.13.1
TM_DIO2: IC3.9 R2.14.1 R5.23.1
TOUCH_PWR: C1.4.1 IC1.3 IC3.1.6 IC3.1.11
TOUCH_PWR1: C1.11.1 IC2.3 IC3.2.6 IC3.2.11
TOUCH_PWR2: C1.19.1 IC3.3 IC3.3.6 IC3.3.11
USB1: IC1.24 R5.9.1 X3.1.2
USB2: IC1.12 R5.8.1 X3.1.3
USB3: IC2.24 R5.18.1 X3.2.2
USB4: IC2.12 R5.17.1 X3.2.3
USB5: IC3.24 R5.28.1 X3.3.2
USB6: IC3.12 R5.27.1 X3.3.3
VBUS: D1.1.3 Q1.1.4 X2.1.1
VBUS1: D1.4.3 Q1.2.4 X2.2.1
VBUS2: D1.7.3 Q1.3.4 X2.3.1